# Altium PCB RevA.PcbDoc (part 1 of 2)
Units mm, origin at the board's own origin, x right, y up, seen from the top; angles counter-clockwise.
Board outline 119.55 x 74.88 mm, 2 copper layers (Top Layer, Bottom Layer); 154 components, 82 nets, 576 pads, 146 vias.
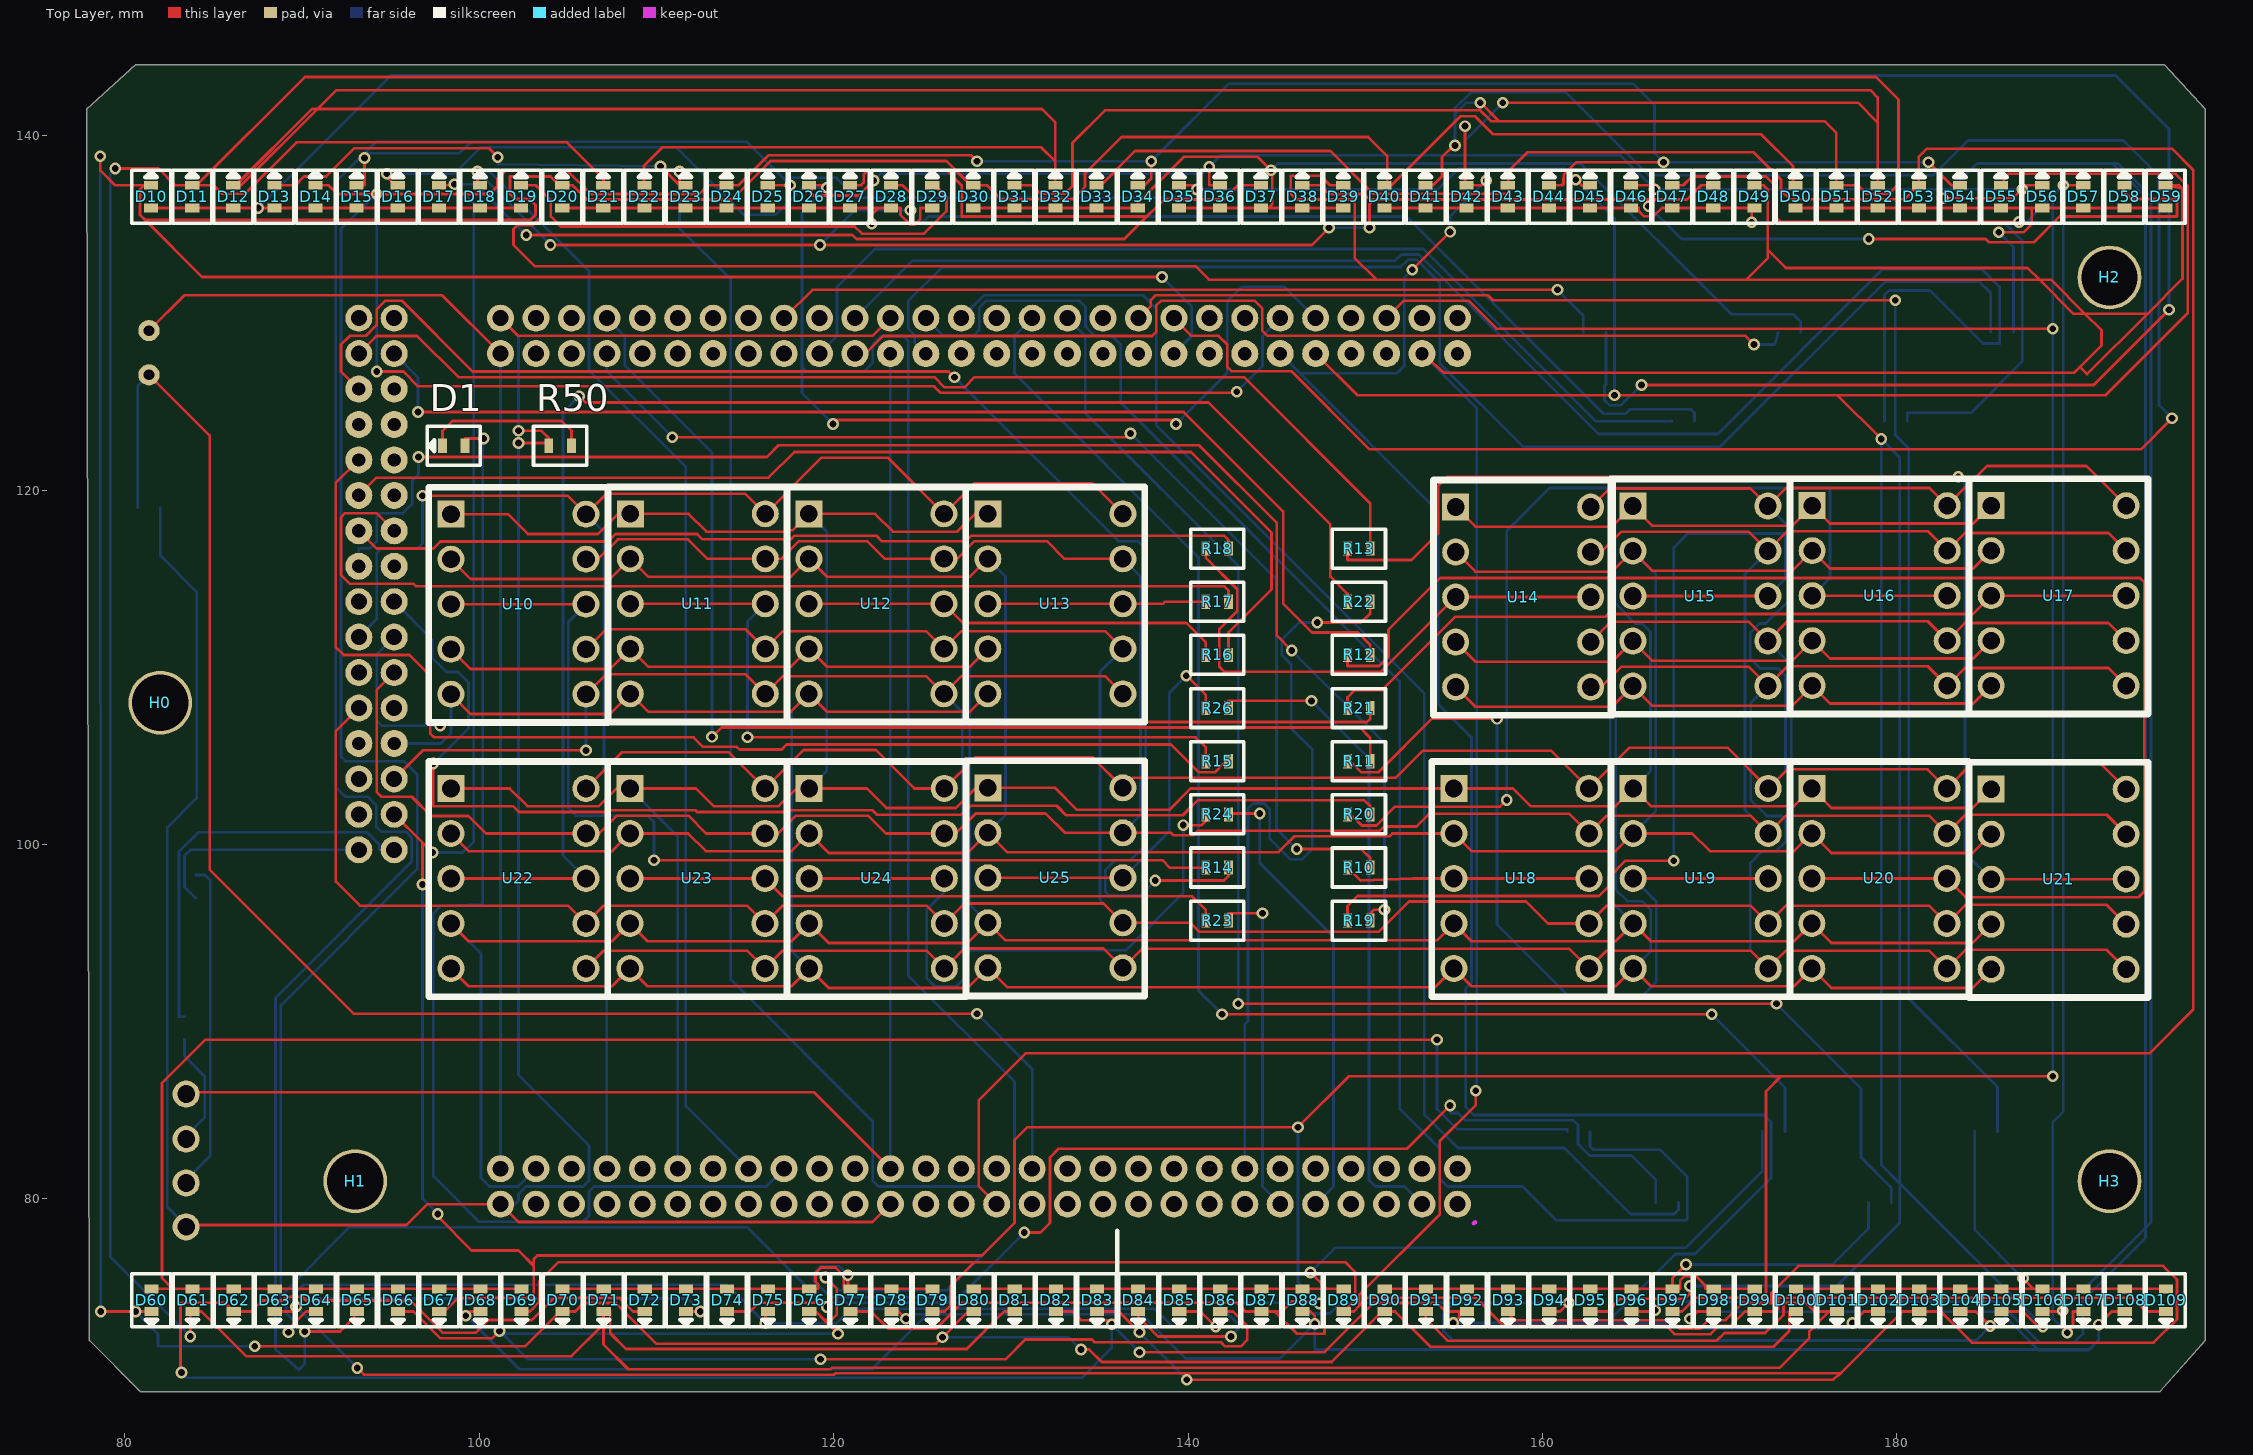
[diagram p0: Top Layer view]
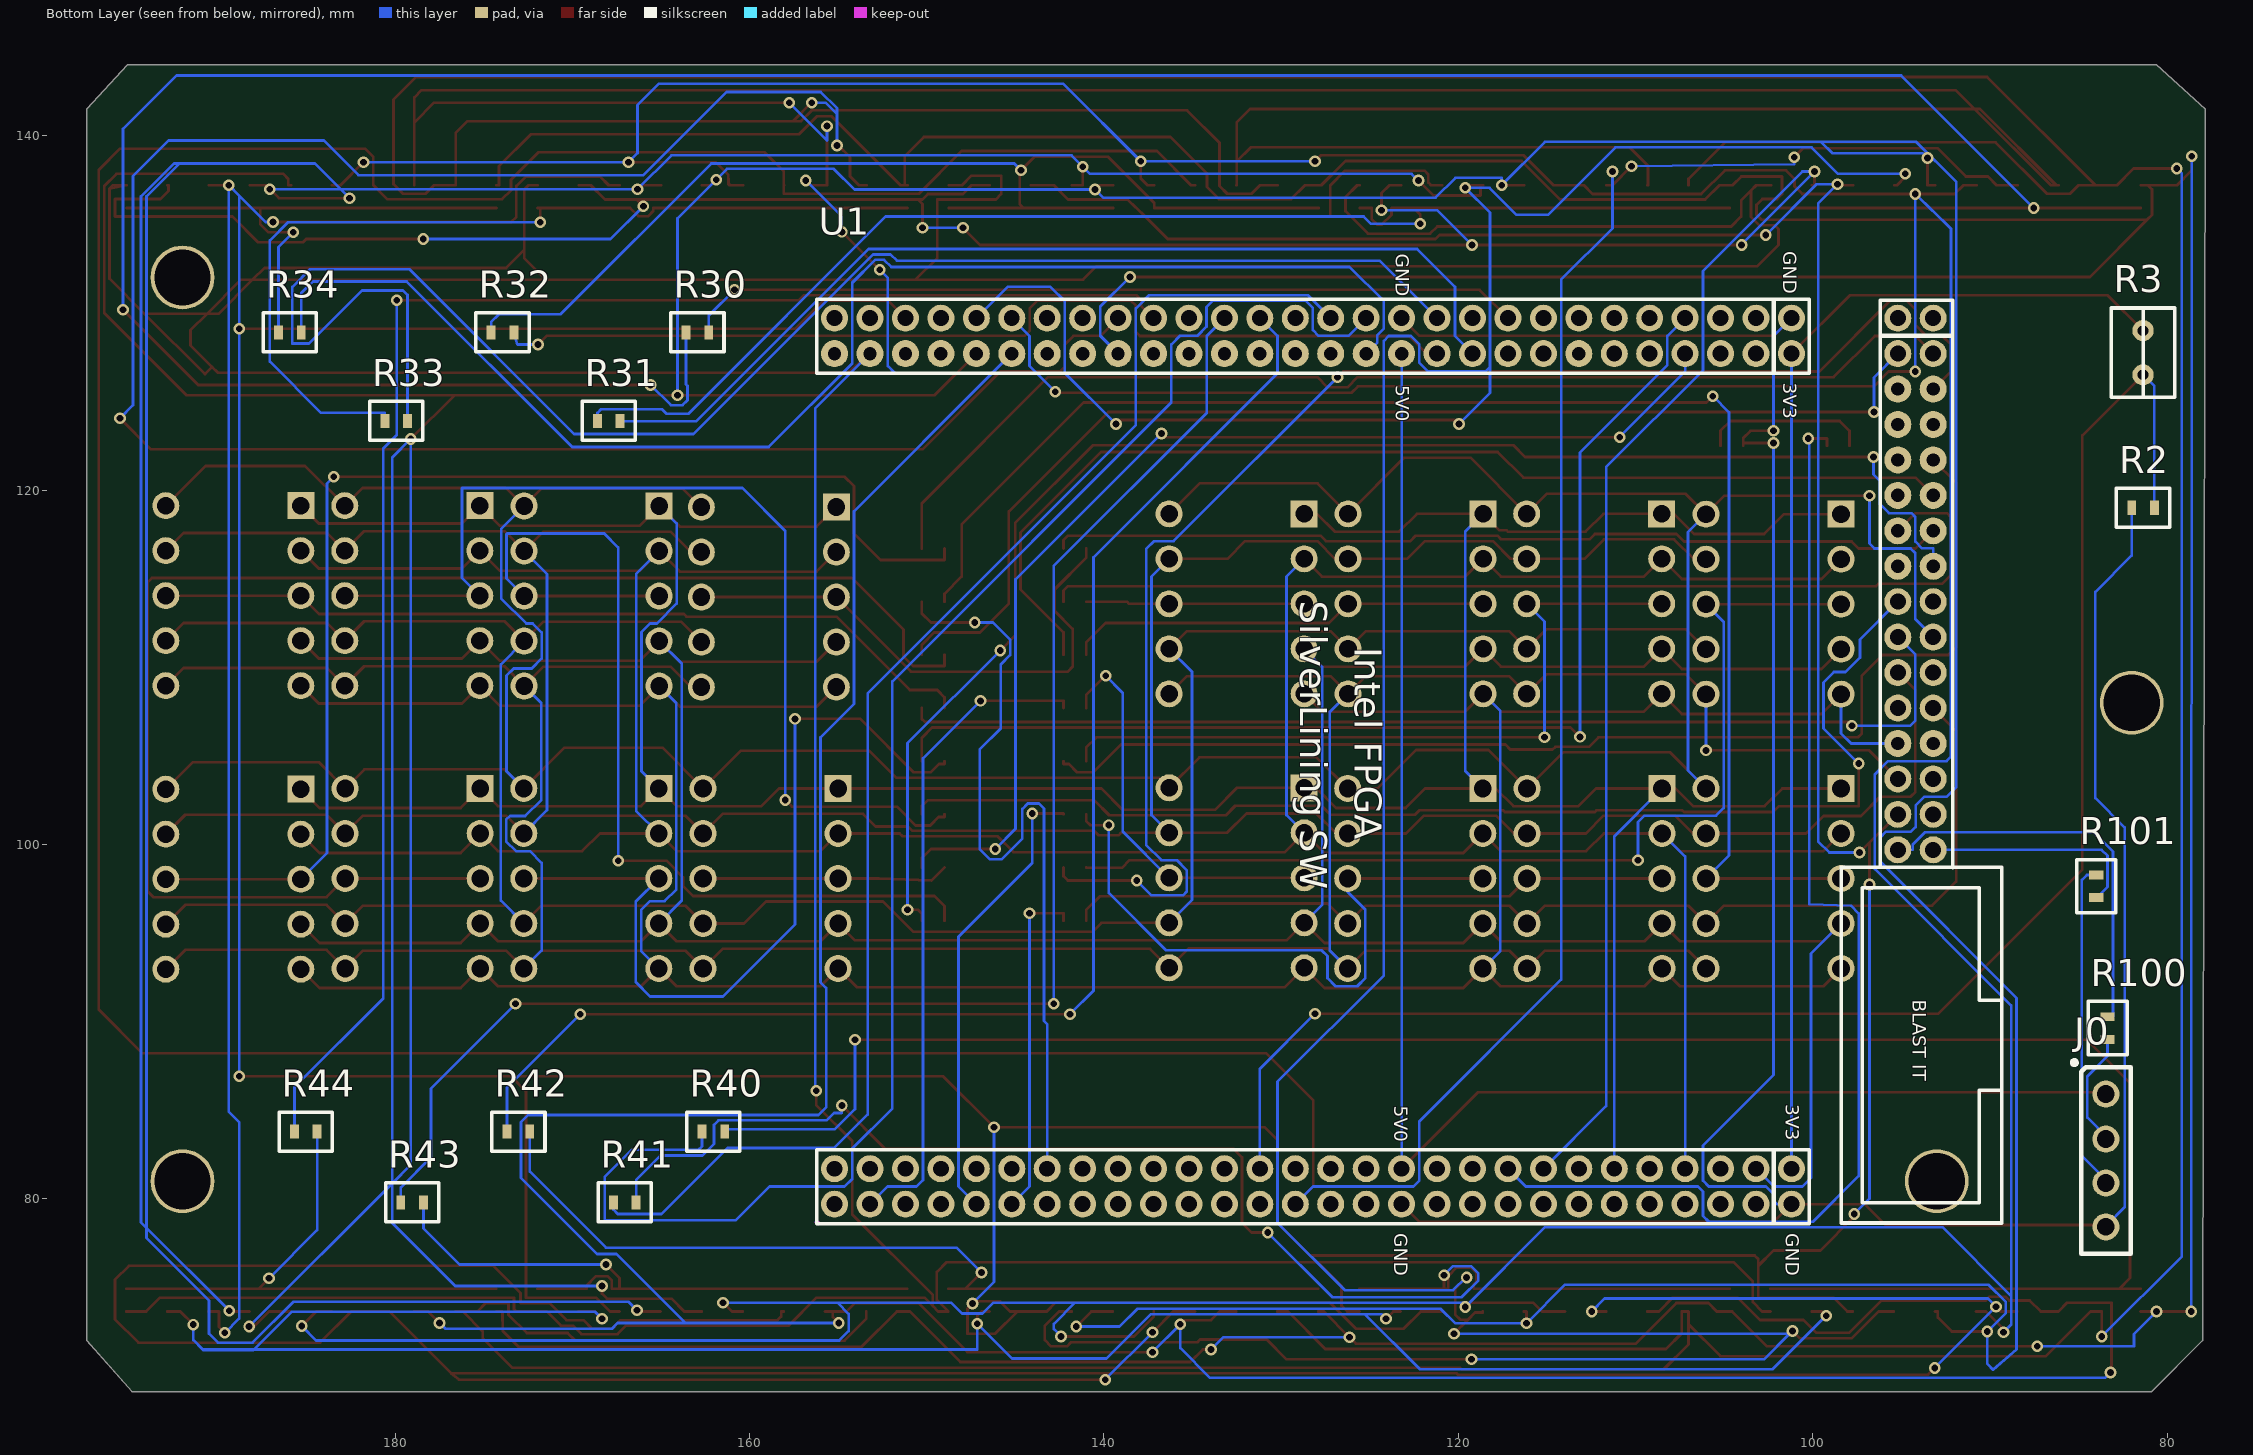
[diagram p1: Bottom Layer view, seen from below]

## Layer stack, top to bottom
Top Solder: solder mask 0.0102, Solder Resist, Dk 3.5
Top Layer: signal copper 0.0356
Dielectric1: dielectric 0.32, FR-4, Dk 4.8
Bottom Layer: signal copper 0.0356
Bottom Solder: solder mask 0.0102, Solder Resist, Dk 3.5

## Board outline
80.88,69.12 78,72 77.85,141.5 80.6,144 195.1,144 197.4,141.5 197.4,72 194.852,69.12

## Design rules (kind name [scope] priority, off if disabled: settings)
BoardOutlineClearance [All] p1: gap=0.254 ignorepadtopadclearanceinfootprint=FALSE
Clearance [All] p1: gap=0.254 ignorepadtopadclearanceinfootprint=FALSE except(0.152: Arc-Arc Arc-Track Arc-SMDPad Arc-THPad Arc-Via Arc-Fill Arc-Poly Arc-Region Arc-Text Track-Track Track-SMDPad Track-THPad Track-Via Track-Fill Track-Poly Track-Region Track-Text SMDPad-SMDPad SMDPad-THPad)
HoleSize [All] p1: absolutevalues=TRUE maxlimit=10 minlimit=0.381 maxpercent=80.000 minpercent=20.000
HoleToHoleClearance [All] p1: gap=0.481 allowstackedmicrovias=TRUE
MinimumAnnularRing [Not IsVia] p1: minimumring=0.18
MinimumSolderMaskSliver [All] p1: minsoldermaskwidth=0.064
PolygonConnect [All] p1: connectstyle=Relief reliefconductorwidth=0.254 reliefentries=4 polygonreliefangle="90 Angle" airgapwidth=0.254
RoomDefinition AFR_Bar_Termination_Resistors [InComponentClass('AFR_Bar_Termination_Resistors')] p1: confinementstyle=ConfineIn formatcopy=TRUE lockcomponents=FALSE outline 191,77.8 158.4,77.8 158.4,86.9 191,86.9
RoomDefinition Boost_Bar_Termination_Resistors [InComponentClass('Boost_Bar_Termination_Resistors')] p2: confinementstyle=ConfineIn formatcopy=TRUE lockcomponents=FALSE outline 200.86,121.9 158.94,121.9 158.94,132.9 200.86,132.9
RoomDefinition LED_Readout_Termination_Resistors [InComponentClass('LED_Readout_Termination_Resistors')] p3: confinementstyle=ConfineIn formatcopy=TRUE lockcomponents=FALSE outline 138.92,91.06 151.98,91.06 151.98,125.06 138.92,125.06
RoomDefinition Uart_and_Daylight_Sensor [InComponentClass('Uart_and_Daylight_Sensor')] p4: confinementstyle=ConfineIn formatcopy=TRUE lockcomponents=FALSE outline 91.36,71.1 73.6,71.1 73.6,138 91.36,138
RoomDefinition Core [InComponentClass('Core')] p5: confinementstyle=ConfineIn formatcopy=TRUE lockcomponents=FALSE outline 159.2,134.7 159.2,75.7 88.2,75.7 88.2,134.7
RoomDefinition LED_Readout_and_Warning_Lights [InComponentClass('LED_Readout_and_Warning_Lights')] p6: confinementstyle=ConfineIn formatcopy=TRUE lockcomponents=FALSE outline 86,86 195.8,86 195.8,126.8 86,126.8
RoomDefinition Hole4 [InComponentClass('Hole4')] p7: confinementstyle=ConfineIn formatcopy=TRUE lockcomponents=FALSE outline 195,78 195,84 187,84 187,78
RoomDefinition Hole3 [InComponentClass('Hole3')] p8: confinementstyle=ConfineIn formatcopy=TRUE lockcomponents=FALSE outline 195,129 195,135 187,135 187,129
RoomDefinition Hole2 [InComponentClass('Hole2')] p9: confinementstyle=ConfineIn formatcopy=TRUE lockcomponents=FALSE outline 90,78 96,78 96,86 90,86
RoomDefinition Hole1 [InComponentClass('Hole1')] p10: confinementstyle=ConfineIn formatcopy=TRUE lockcomponents=FALSE outline 79,105 85,105 85,113 79,113
RoomDefinition Boost_Bar [InComponentClass('Boost_Bar')] p11: confinementstyle=ConfineIn formatcopy=TRUE lockcomponents=FALSE outline 77.76,134.56 197.48,134.56 197.48,140.56 77.76,140.56
RoomDefinition AFR_bar [InComponentClass('AFR_bar')] p12: confinementstyle=ConfineIn formatcopy=TRUE lockcomponents=FALSE outline 77.5,72.4 197.5,72.4 197.5,79.4 77.5,79.4
RoutingPriority ClockPriority [InNet('XIN') OR InNet('XOUT') OR InNet('XIN32') OR InNet('XOUT32')] p1: routingpriority=80
RoutingPriority PowerPriority [InNet('1V8') OR InNet('3V3') OR InNet('VBAT') OR InNet('5V') OR InNet('GND') OR InNet('VDDANA') OR InNet('VDDUTMI') OR InNet('VDDPLL')] p2: routingpriority=90
RoutingPriority DiffPairsPriority [InNet('CAN_N')   OR InNet('CAN_P') OR InNet('USBD_N') OR InNet('USBD_P') OR InNet('USBH_N') OR InNet('USBH_P')] p3: routingpriority=100
RoutingVias [All] p1: holewidth=0.381 width=0.66 viastyle="Through Hole" minholewidth=0.381 minwidth=0.66 maxholewidth=0.381 maxwidth=0.66
SMDNeckDown [All] p1: percent=200.000
SilkToBoardRegionClearance SilkToBoardRegionClearance_1 [All] p2:
SilkToSilkClearance [All] p1: silktosilkclearance=0.152
SilkToSolderMaskClearance [IsPad] p1: minsilkscreentomaskgap=0.152 clearancetoexposedcopper=TRUE
SolderMaskExpansion [All] p1: expansion=0.102
Width SilkWidth [OnLayer('Top Overlay') or OnLayer('Bottom Overlay')] p1: maxlimit=2.54 minlimit=0.08 preferedwidth=0.127
Width [All] p2: maxlimit=0.2 minlimit=0.152 preferedwidth=0.152
24 further rules are at their usual default settings.

## Classes and differential pairs
component class LED_Readout_Termination_Resistors: R10 R11 R12 R13 R14 R15 R16 R17 R18 R19 R20 R21 R22 R23 R24 R26
component class Boost_Bar_Termination_Resistors: R30 R31 R32 R33 R34
component class AFR_Bar_Termination_Resistors: R40 R41 R42 R43 R44
component class Uart_and_Daylight_Sensor: J0 R2 R3 R100 R101
component class LED_Readout_and_Warning_Lights: D1 R50 U10 U11 U12 U13 U14 U15 U16 U17 U18 U19 U20 U21 U22 U23 U24 U25
component class Hole4: H3
component class Hole3: H2
component class Hole2: H1
component class Hole1: H0
component class Core: U1
component class Boost_Bar: D10 D11 D12 D13 D14 D15 D16 D17 D18 D19 D20 D21 D22 D23 D24 D25 D26 D27 D28 D29 D30 D31 D32 D33 D34 D35 D36 D37 D38 D39 D40 D41 D42 D43 D44 D45 D46 D47 D48 D49 D50 D51 D52 D53 D54 D55 D56 D57 D58 D59
component class AFR_bar: D60 D61 D62 D63 D64 D65 D66 D67 D68 D69 D70 D71 D72 D73 D74 D75 D76 D77 D78 D79 D80 D81 D82 D83 D84 D85 D86 D87 D88 D89 D90 D91 D92 D93 D94 D95 D96 D97 D98 D99 D100 D101 D102 D103 D104 D105 D106 D107 D108 D109

## Components (designator, comment, footprint, x,y, rotation, side; value= is the part's Value field where it differs from the comment)
D1 "WARNING" DIODE_0603 98.56,122.5 r180 top
D10 "" DIODE_0603 81.48,136.56 r90 top
D11 "" DIODE_0603 83.8,136.56 r90 top
D12 "" DIODE_0603 86.12,136.56 r90 top
D13 "" DIODE_0603 88.44,136.56 r90 top
D14 "" DIODE_0603 90.76,136.56 r90 top
D15 "" DIODE_0603 93.08,136.56 r90 top
D16 "" DIODE_0603 95.4,136.56 r90 top
D17 "" DIODE_0603 97.72,136.56 r90 top
D18 "" DIODE_0603 100.04,136.56 r90 top
D19 "" DIODE_0603 102.36,136.56 r90 top
D20 "" DIODE_0603 104.68,136.56 r90 top
D21 "" DIODE_0603 107,136.56 r90 top
D22 "" DIODE_0603 109.32,136.56 r90 top
D23 "" DIODE_0603 111.64,136.56 r90 top
D24 "" DIODE_0603 113.96,136.56 r90 top
D25 "" DIODE_0603 116.28,136.56 r90 top
D26 "" DIODE_0603 118.6,136.56 r90 top
D27 "" DIODE_0603 120.92,136.56 r90 top
D28 "" DIODE_0603 123.24,136.56 r90 top
D29 "" DIODE_0603 125.56,136.56 r90 top
D30 "" DIODE_0603 127.88,136.56 r90 top
D31 "" DIODE_0603 130.2,136.56 r90 top
D32 "" DIODE_0603 132.52,136.56 r90 top
D33 "" DIODE_0603 134.84,136.56 r90 top
D34 "" DIODE_0603 137.16,136.56 r90 top
D35 "" DIODE_0603 139.48,136.56 r90 top
D36 "" DIODE_0603 141.8,136.56 r90 top
D37 "" DIODE_0603 144.12,136.56 r90 top
D38 "" DIODE_0603 146.44,136.56 r90 top
D39 "" DIODE_0603 148.76,136.56 r90 top
D40 "" DIODE_0603 151.08,136.56 r90 top
D41 "" DIODE_0603 153.4,136.56 r90 top
D42 "" DIODE_0603 155.72,136.56 r90 top
D43 "" DIODE_0603 158.04,136.56 r90 top
D44 "" DIODE_0603 160.36,136.56 r90 top
D45 "" DIODE_0603 162.68,136.56 r90 top
D46 "" DIODE_0603 165,136.56 r90 top
D47 "" DIODE_0603 167.32,136.56 r90 top
D48 "" DIODE_0603 169.64,136.56 r90 top
D49 "" DIODE_0603 171.96,136.56 r90 top
D50 "" DIODE_0603 174.28,136.56 r90 top
D51 "" DIODE_0603 176.6,136.56 r90 top
D52 "" DIODE_0603 178.92,136.56 r90 top
D53 "" DIODE_0603 181.24,136.56 r90 top
D54 "" DIODE_0603 183.56,136.56 r90 top
D55 "" DIODE_0603 185.88,136.56 r90 top
D56 "" DIODE_0603 188.2,136.56 r90 top
D57 "" DIODE_0603 190.52,136.56 r90 top
D58 "" DIODE_0603 192.84,136.56 r90 top
D59 "" DIODE_0603 195.16,136.56 r90 top
D60 "" DIODE_0603 81.5,74.28 r270 top
D61 "" DIODE_0603 83.82,74.28 r270 top
D62 "" DIODE_0603 86.14,74.28 r270 top
D63 "" DIODE_0603 88.46,74.28 r270 top
D64 "" DIODE_0603 90.78,74.28 r270 top
D65 "" DIODE_0603 93.1,74.28 r270 top
D66 "" DIODE_0603 95.42,74.28 r270 top
D67 "" DIODE_0603 97.74,74.28 r270 top
D68 "" DIODE_0603 100.06,74.28 r270 top
D69 "" DIODE_0603 102.38,74.28 r270 top
D70 "" DIODE_0603 104.7,74.28 r270 top
D71 "" DIODE_0603 107.02,74.28 r270 top
D72 "" DIODE_0603 109.34,74.28 r270 top
D73 "" DIODE_0603 111.66,74.28 r270 top
D74 "" DIODE_0603 113.98,74.28 r270 top
D75 "" DIODE_0603 116.3,74.28 r270 top
D76 "" DIODE_0603 118.62,74.28 r270 top
D77 "" DIODE_0603 120.94,74.28 r270 top
D78 "" DIODE_0603 123.26,74.28 r270 top
D79 "" DIODE_0603 125.58,74.28 r270 top
D80 "" DIODE_0603 127.9,74.28 r270 top
D81 "" DIODE_0603 130.22,74.28 r270 top
D82 "" DIODE_0603 132.54,74.28 r270 top
D83 "" DIODE_0603 134.86,74.28 r270 top
D84 "" DIODE_0603 137.18,74.28 r270 top
D85 "" DIODE_0603 139.5,74.28 r270 top
D86 "" DIODE_0603 141.82,74.28 r270 top
D87 "" DIODE_0603 144.14,74.28 r270 top
D88 "" DIODE_0603 146.46,74.28 r270 top
D89 "" DIODE_0603 148.78,74.28 r270 top
D90 "" DIODE_0603 151.1,74.28 r270 top
D91 "" DIODE_0603 153.42,74.28 r270 top
D92 "" DIODE_0603 155.74,74.28 r270 top
D93 "" DIODE_0603 158.06,74.28 r270 top
D94 "" DIODE_0603 160.38,74.28 r270 top
D95 "" DIODE_0603 162.7,74.28 r270 top
D96 "" DIODE_0603 165.02,74.28 r270 top
D97 "" DIODE_0603 167.34,74.28 r270 top
D98 "" DIODE_0603 169.66,74.28 r270 top
D99 "" DIODE_0603 171.98,74.28 r270 top
D100 "" DIODE_0603 174.3,74.28 r270 top
D101 "" DIODE_0603 176.62,74.28 r270 top
D102 "" DIODE_0603 178.94,74.28 r270 top
D103 "" DIODE_0603 181.26,74.28 r270 top
D104 "" DIODE_0603 183.58,74.28 r270 top
D105 "" DIODE_0603 185.9,74.28 r270 top
D106 "" DIODE_0603 188.22,74.28 r270 top
D107 "" DIODE_0603 190.54,74.28 r270 top
D108 "" DIODE_0603 192.86,74.28 r270 top
D109 "" DIODE_0603 195.18,74.28 r270 top
H0 "STANDOFF HOLE" HOLE_3MM 82,108 r0 top
H1 "STANDOFF HOLE" HOLE_3MM 93,81 r0 top
H2 "STANDOFF HOLE" HOLE_3MM 192,132 r90 top
H3 "STANDOFF HOLE" HOLE_3MM 192,81 r90 top
J0 "CONN HEADER R/A SGL 4POS GOLD (display)" HEADER_4POS -1176.257,1342.959 r180 bottom
R2 "Figure out ohmage after RevA" RES_0603 81.36,119 r180 bottom value=NOSTUFF
R3 "Daylight photocell to connect in series forming voltage divider" RES_NSL-19M51 81.36,129 r270 bottom
R10 "Figure out ohmage after RevA" RES_0603 149.64,98.7 r180 top value=NOSTUFF
R11 "Figure out ohmage after RevA" RES_0603 149.64,104.7 r180 top value=NOSTUFF
R12 "Figure out ohmage after RevA" RES_0603 149.64,110.7 r180 top value=NOSTUFF
R13 "Figure out ohmage after RevA" RES_0603 149.64,116.7 r180 top value=NOSTUFF
R14 "Figure out ohmage after RevA" RES_0603 141.64,98.7 r180 top value=NOSTUFF
R15 "Figure out ohmage after RevA" RES_0603 141.64,104.7 r180 top value=NOSTUFF
R16 "Figure out ohmage after RevA" RES_0603 141.64,110.7 r180 top value=NOSTUFF
R17 "Figure out ohmage after RevA" RES_0603 141.64,113.7 r180 top value=NOSTUFF
R18 "Figure out ohmage after RevA" RES_0603 141.64,116.7 r180 top value=NOSTUFF
R19 "Figure out ohmage after RevA" RES_0603 149.64,95.7 r180 top value=NOSTUFF
R20 "Figure out ohmage after RevA" RES_0603 149.64,101.7 r180 top value=NOSTUFF
R21 "Figure out ohmage after RevA" RES_0603 149.64,107.7 r180 top value=NOSTUFF
R22 "Figure out ohmage after RevA" RES_0603 149.64,113.7 r180 top value=NOSTUFF
R23 "Figure out ohmage after RevA" RES_0603 141.64,95.7 r180 top value=NOSTUFF
R24 "Figure out ohmage after RevA" RES_0603 141.64,101.7 r180 top value=NOSTUFF
R26 "Figure out ohmage after RevA" RES_0603 141.64,107.7 r180 top value=NOSTUFF
R30 "Figure out ohmage after RevA" RES_0603 162.94,128.9 r0 bottom value=NOSTUFF
R31 "Figure out ohmage after RevA" RES_0603 167.94,123.9 r0 bottom value=NOSTUFF
R32 "Figure out ohmage after RevA" RES_0603 173.94,128.9 r0 bottom value=NOSTUFF
R33 "Figure out ohmage after RevA" RES_0603 179.94,123.9 r0 bottom value=NOSTUFF
R34 "Figure out ohmage after RevA" RES_0603 185.94,128.9 r0 bottom value=NOSTUFF
R40 "Figure out ohmage after RevA" RES_0603 162.04,83.8 r180 bottom value=NOSTUFF
R41 "Figure out ohmage after RevA" RES_0603 167.04,79.8 r180 bottom value=NOSTUFF
R42 "Figure out ohmage after RevA" RES_0603 173.04,83.8 r180 bottom value=NOSTUFF
R43 "Figure out ohmage after RevA" RES_0603 179.04,79.8 r180 bottom value=NOSTUFF
R44 "Figure out ohmage after RevA" RES_0603 185.04,83.8 r180 bottom value=NOSTUFF
R50 "Figure out ohmage after RevA" RES_0603 104.56,122.5 r180 top value=NOSTUFF
R100 "0R" RES_0603 83.36,89.64 r90 bottom value=NOSTUFF
R101 "Figure out ohmage after RevA" RES_0603 84,97.64 r90 bottom value=NOSTUFF
U1 "CoreEP3C16" COREEP3C16 125.077,104.166 r270 bottom
U10 "TDSR1050" TDSR1050 98.4,118.64 r0 top
U11 "TDSR1050" TDSR1050 108.52,118.66 r0 top
U12 "TDSR1050" TDSR1050 118.6,118.66 r0 top
U13 "TDSR1050" TDSR1050 128.7,118.66 r0 top
U14 "TDSR1050" TDSR1050 155.1,119.04 r0 top
U15 "TDSR1050" TDSR1050 165.1,119.1 r0 top
U16 "TDSR1050" TDSR1050 175.22,119.12 r0 top
U17 "TDSR1050" TDSR1050 185.32,119.12 r0 top
U18 "TDSR1050" TDSR1050 155,103.16 r0 top
U19 "TDSR1050" TDSR1050 165.12,103.16 r0 top
U20 "TDSR1050" TDSR1050 175.2,103.16 r0 top
U21 "TDSR1050" TDSR1050 185.32,103.12 r0 top
U22 "TDSR1050" TDSR1050 98.4,103.16 r0 top
U23 "TDSR1050" TDSR1050 108.5,103.16 r0 top
U24 "TDSR1050" TDSR1050 118.62,103.16 r0 top
U25 "TDSR1050" TDSR1050 128.7,103.2 r0 top

## Footprints (in the part's own frame and the unit in brackets; to place one, negate y for a bottom-side part, rotate by r counter-clockwise, add the part's x,y. Pads: shape width x height; smd on the part's side, far side on the other; paste and mask are expansions set on the pad)
COREEP3C16 [mil] "ALTERA Cyclone III FPGA Development Board Full I/O Expander JTAG Interface"
  round 60 hole 35.43: 3V31(-926.55,940.04) 3V32(884.47,940.04) 4(-926.55,625.08) 5(-1005.29,625.08) 5V02(884.47,73.9) 6(-926.55,546.34) 9(-1005.29,546.34) 18(-1005.29,467.6) 19(-926.55,388.86) 20(-1005.29,388.86) 21(-926.55,310.12) 22(-1005.29,310.12) 37(-926.55,231.38) 38(-1005.29,231.38) 39(-926.55,152.64) 41(-1005.29,152.64) 44(-1005.29,-4.84) 46(-1005.29,-83.58) 50(-1005.29,-162.32) 52(-1005.29,-241.07) 56(-1005.29,-319.81) 63(-1005.29,-398.55) 65(-1005.29,-477.29) 69(-1005.29,-556.03) 71(-1005.29,-634.77) 73(-1005.29,-713.51) 78(-1005.29,-792.25) 82(-1005.29,-870.99) 84(-1005.29,-949.73) 86(-1005.29,-1028.47) 86(97.07,1176.26) 93(-1005.29,-1107.21) 95(-1005.29,-1185.95) 100(884.47,-1185.95) 101(963.21,-1185.95) 102(884.47,-1107.21) 103(963.21,-1107.21) 104(884.47,-1028.47) 107(963.21,-1028.47) 108(884.47,-949.73) 110(963.21,-949.73) 111(884.47,-870.99) 112(963.21,-870.99) 113(884.47,-792.25) 114(963.21,-792.25) 117(884.47,-713.51) 118(963.21,-713.51) 119(884.47,-634.77) 120(963.21,-634.77) 126(884.47,-556.03) 127(963.21,-556.03) 128(884.47,-477.29) 131(963.21,-477.29) 132(884.47,-398.55) 133(963.21,-398.55) 134(884.47,-319.81) 135(963.21,-319.81) 137(884.47,-241.07) 139(963.21,-241.07) 142(884.47,-162.32) 143(963.21,-162.32) 144(884.47,-83.58) 145(963.21,-83.58) 146(884.47,-4.84) 147(963.21,-4.84) 148(884.47,152.64) 159(963.21,152.64) 160(884.47,231.38) 161(963.21,231.38) 162(884.47,310.12) 164(963.21,310.12) 166(884.47,388.86) 167(963.21,388.86) 168(884.47,467.6) 169(963.21,467.6) 171(884.47,546.34) 173(963.21,546.34) 174(884.47,625.08) 175(963.21,625.08) 176(884.47,703.82) 177(963.21,703.82) 181(884.47,782.56) 182(963.21,782.56) 183(884.47,861.3) 184(963.21,861.3) 185(175.81,1255) 186(175.81,1176.26) 187(97.07,1255) 189(18.33,1255) 194(18.33,1176.26) 197(-139.15,1255) 198(-139.15,1176.26) 199(-217.89,1255) 200(-217.89,1176.26) 201(-296.63,1255) 202(-296.63,1176.26) 203(-375.37,1255) 207(-375.37,1176.26) 231(-926.55,1255) 232(-926.55,1176.26) 233(-1005.29,1255) 234(-1005.29,1176.26) 235(-1005.29,861.3) 236(-926.55,861.3) 237(-1005.29,782.56) 238(-926.55,782.56) 239(-1005.29,703.82) 240(-926.55,703.82) GND1(-1005.29,940.04) GND2(-1005.29,73.9) GND3(963.21,73.9) GND4(963.21,940.04)
  round 60 hole 29.53: 5V01(-926.55,73.9) 13(-926.55,467.6) 43(-926.55,-4.84) 45(-926.55,-83.58) 49(-926.55,-162.32) 51(-926.55,-241.07) 55(-926.55,-319.81) 57(-926.55,-398.55) 64(-926.55,-477.29) 68(-926.55,-556.03) 70(-926.55,-634.77) 72(-926.55,-713.51) 76(-926.55,-792.25) 81(-926.55,-870.99) 83(-926.55,-949.73) 85(-926.55,-1028.47) 87(-926.55,-1107.21) 94(-926.55,-1185.95) 195(-60.41,1255) 196(-60.41,1176.26) 214(-454.11,1255) 216(-454.11,1176.26) 217(-532.85,1255) 218(-532.85,1176.26) 219(-611.59,1255) 220(-611.59,1176.26) 221(-690.33,1255) 222(-690.33,1176.26) 223(-769.07,1255) 224(-769.07,1176.26) 226(-847.81,1255) 230(-847.81,1176.26)
  Keep-Out Layer lines w10: 1006.06,-1222.56 1003.06,-1225.56
  silkscreen extent -1047,-1225 1007,1407, body extent -1047,-1222 1000,1376, height 394
DIODE_0603 [mm]
  rect 0.5x0.8 smd: 1(-0.64,0) 2(0.64,0)
  silkscreen extent -1.5,-1.1 1.5,1.1, body extent -0.83,-0.45 0.83,0.44, height 0.35
HEADER_4POS [mil] "4 Positions Header, Unshrouded Connector 0.100\" (2.54mm) Through Hole, Right Angle Gold"
  round 60 hole 39.37: 1(-49595,-49490) 2(-49595,-49590) 3(-49595,-49687.5) 4(-49595,-49785)
  silkscreen extent -49670,-49845 -49540,-49415, body extent -49643,-49847 -49228,-49432, height 193
HOLE_3MM [mm] "A 3mm wide drill hole."
  round 3.6 hole 3.175: 0(0,0)
RES_0603 [mm]
  rect 0.5x0.8 smd: 1(-0.64,0) 2(0.64,0)
  silkscreen extent -1.5,-1.1 1.5,1.1, body extent -0.82,-0.44 0.83,0.45, height 0.35
RES_NSL-19M51 [mm]
  round 1.2 hole 0.6: 1(0,0) 2(2.5,0)
  silkscreen extent -1.28,-1.8 3.78,1.8
TDSR1050 [mil] "High Intensity Red Low Current 7-Segment Display"
  rect 60x60 hole 39.37: 1(0,0)
  round 60 hole 39.37: 2(0,-100) 3(0,-200) 4(0,-300) 5(0,-400) 6(300,-400) 7(300,-300) 8(300,-200) 9(300,-100) 10(300,0)
  silkscreen extent -49,-463 348,60, body extent -35,-451 337,45, height 276

## Part data
D1 D10 D11 D12 D13 D14 D15 D16 D17 D18 D19 D20 D21 D22 D23 D24 D25 D26 D27 D28 D29 D30 D31 D32 D33 D34 D35 D36 D37 D38 D39 D40 D41 D42 D43 D44 D45 D46 D47 D48 D49 D50 D51 D52 D53 D54 D55 D56 D57 D58 D59 D60 D61 D62 D63 D64 D65 D66 D67 D68 D69 D70 D71 D72 D73 D74 D75 D76 D77 D78 D79 D80 D81 D82 D83 D84 D85 D86 D87 D88 D89 D90 D91 D92 D93 D94 D95 D96 D97 D98 D99 D100 D101 D102 D103 D104 D105 D106 D107 D108 D109: library part LED0, "Typical INFRARED GaAs LED", LatestRevisionDate=08-Jul-2005, LatestRevisionNote="Mech Layer 1 removed.", PackageDescription="LED; 2 Leads", PackageReference=LED-0, Published=8-Jun-2000, Publisher="Altium Limited"
H0 H1 H2 H3: library part "3mm HOLE"
J0: "http://multimedia.3m.com/mws/media/548122O/3mtm-pin-strip-header-ts2182.pdf", Supplier Part Number 1=3M9469-ND, Supplier 1=Digi-Key
R2 R10 R11 R12 R13 R14 R15 R16 R17 R18 R19 R20 R21 R22 R23 R24 R26 R30 R31 R32 R33 R34 R40 R41 R42 R43 R44 R50 R100 R101: library part Res1, "Resistor", LatestRevisionDate=17-Jul-2002, LatestRevisionNote="Re-released for DXP Platform.", PackageDescription="Axial Device, Thru-Hole; 2 Leads; 0.3 in Pin Spacing", PackageReference=AXIAL-0.3, Published=8-Jun-2000, Publisher="Altium Limited"
R3: library part "PHOTOCELL 16-33KOHM", "http://media.digikey.com/pdf/Data%20Sheets/Photonic%20Detetectors%20Inc%20PDFs/PDV-P8103.pdf", Supplier Part Number 1=PDV-P8103-ND, Supplier 1=Digi-Key
U1: "Intel FPGA Core"
U10 U11 U12 U13 U14 U15 U16 U17 U18 U19 U20 U21 U22 U23 U24 U25: "High Intensity Red Low Current 7-Segment Display", Supplier Part Number 1=TDSR1050-ND, Supplier 1=Digi-Key

## Via types
v1: diameter 0.66, hole 0.381, Top Layer to Bottom Layer, 146 vias

## Nets (pads, with @x,y where several pads share a name; then routed paths per layer and width w, separated by ;. In a path a pad name is that pad's centre, name@x,y a point inside that pad or via, vN(x,y) a via of type N, cw(c..) or ccw(c..) an arc to the next point about the centre after c; other vN are vias at no path point)
3V3: R3.1 U1.3V31 U1.3V32 | length 68
  Top Layer w0.152: R3.1@81.36,129 83.355,130.995 97.905,130.995 U1.3V31@101.2,127.7
  Bottom Layer w0.152: U1.3V32@101.2,81.7 U1.3V31@101.2,127.7
5V0: J0.1 U1.5V01 U1.5V02 | length 87.6
  Top Layer w0.152: J0.1@83.4,86.016 118.884,86.016 U1.5V02@123.2,81.7
  Bottom Layer w0.152: U1.5V02@123.2,81.7 U1.5V01@123.2,127.7
C0: R10.2 U18.3 U18.8 | length 13.9
  Top Layer w0.152: R10.2@149,98.7 149.732,97.968 152.69,98.08 U18.3@155,98.08 U18.8@162.62,98.08
C0/IO_VB8N3_240: R10.1 U1.240 | length 64.4
  Top Layer w0.152: v1(110.896,122.987) 136.55,122.987 v1(136.754,123.19) ; v1(146.126,99.746) 149.758,99.746 150.28,99.224 R10.1@150.28,98.7
  Bottom Layer w0.152: U1.240@107.2,127.7 107.2,126.683 v1(110.896,122.987) ; v1(136.754,123.19) 144.984,114.959 144.984,100.888 v1(146.126,99.746)
C1: R11.2 U19.3 U19.8 | length 46.7
  Top Layer w0.152: R11.2@149,104.7 149,104.546 149.309,104.546 149.784,104.072 150.732,104.072 153.746,107.086 v1(157.429,107.086) ; U19.3@165.12,98.08 U19.8@172.74,98.08
  Bottom Layer w0.152: v1(157.429,107.086) 157.429,95.479 161.493,91.415 165.608,91.415 166.421,92.227 166.421,96.779 U19.3@165.12,98.08
C1/IO_VB8N3_239: R11.1 U1.239 | length 65
  Top Layer w0.152: v1(113.132,106.07) 113.664,106.603 149.696,106.603 150.28,106.02 R11.1@150.28,104.7
  Bottom Layer w0.152: U1.239@107.2,129.7 108.204,128.696 108.204,127.051 113.132,122.123 v1(113.132,106.07)
C2: R12.2 U20.3 U20.8 | length 85.4
  Top Layer w0.152: R12.2@149,110.7 149,110.072 150.774,110.072 151.312,110.61 151.312,112.12 154.229,115.037 193.726,115.037 193.954,114.808 193.954,97.333 193.65,97.028 183.872,97.028 U20.8@182.82,98.08 U20.3@175.2,98.08
C2/IO_VB8N2_232: R12.1 U1.232 | length 66.6
  Top Layer w0.152: v1(96.545,124.409) 139.751,124.409 145.364,118.796 145.364,113.589 146.994,111.959 149.584,111.959 150.28,111.264 R12.1@150.28,110.7
  Bottom Layer w0.152: U1.232@95.2,127.7 96.545,126.355 v1(96.545,124.409)
C3: R13.2 U21.3 U21.8 | length 69.7
  Top Layer w0.152: R13.2@149,116.7 149,116.053 152.603,116.053 154.102,117.551 154.102,120.218 154.635,120.752 v1(183.464,120.752) ; U21.3@185.32,98.04 U21.8@192.94,98.04
  Bottom Layer w0.152: v1(183.464,120.752) 183.845,120.371 183.845,99.515 U21.3@185.32,98.04
C3/IO_VB8N2_231: R13.1 U1.231 | length 64.4
  Top Layer w0.152: U1.231@93.2,127.7 94.19,128.69 96.495,128.69 98.815,126.37 125.69,126.37 126.264,125.796 127.381,125.796 127.955,126.37 143.15,126.37 150.28,119.239 R13.1@150.28,116.7
C4: R14.2 U10.3 U10.8 | length 58.2
  Top Layer w0.152: U10.3@98.4,113.56 U10.8@106.02,113.56 ; v1(109.855,99.111) 138.557,99.111 138.989,98.679 141,98.679 R14.2@141,98.7
  Bottom Layer w0.152: U10.8@106.02,113.56 105.029,112.569 105.029,102.057 105.461,101.625 109.499,101.625 109.855,101.27 v1(109.855,99.111)
C4/IO_VB8N2_226: R14.1 U1.226 | length 84.5
  Top Layer w0.152: U1.226@93.2,125.7 92.202,126.698 92.202,128.219 92.693,128.71 93.61,128.71 94.209,129.308 94.209,130.2 94.698,130.69 95.624,130.69 99.619,126.695 126.492,126.695 v1(126.822,126.365) ; v1(138.151,97.968) 142.037,97.968 142.28,98.211 R14.1@142.28,98.7
  Bottom Layer w0.152: v1(126.822,126.365) 136.068,117.119 137.16,117.119 137.617,116.662 137.617,99.974 136.754,99.111 135.889,99.111 135.33,98.552 135.33,97.333 135.533,97.13 137.312,97.13 v1(138.151,97.968)
C5: R15.2 U11.3 U11.8 | length 42.4
  Top Layer w0.152: U11.3@108.52,113.58 U11.8@116.14,113.58 ; v1(115.138,106.045) 140.416,106.045 141,105.461 R15.2@141,104.7
  Bottom Layer w0.152: v1(115.138,106.045) 115.138,112.578 U11.8@116.14,113.58
C5/IO_VB8N2_221: R15.1 U1.221 | length 66.9
  Top Layer w0.152: U1.221@93.2,121.7 91.897,120.397 91.897,111.15 92.354,110.693 96.063,110.693 97.231,109.525 97.231,106.274 97.46,106.045 112.09,106.045 112.623,105.512 114.528,105.512 114.681,105.359 117.069,105.359 117.348,105.639 139.04,105.639 140.606,104.072 141.503,104.072 141.978,104.546 142.28,104.546 R15.1@142.28,104.7
C6: R16.2 U12.3 U12.8 | length 24
  Top Layer w0.152: U12.3@118.6,113.58 U12.8@126.22,113.58 127.303,112.497 139.908,112.497 141,111.404 R16.2@141,110.7
C6/IO_VB8N1_219: R16.1 U1.219 | length 62.3
  Top Layer w0.152: U1.219@93.2,119.7 94.201,120.701 116.332,120.701 117.78,122.149 140.157,122.149 144.704,117.602 144.704,114.396 142.28,111.973 R16.1@142.28,110.7
C7: R17.2 U13.3 U13.8 | length 12.3
  Top Layer w0.152: U13.3@128.7,113.58 U13.8@136.32,113.58 138.582,113.58 138.702,113.7 R17.2@141,113.7
C7/IO_VB8N0_218: R17.1 U1.218 | length 57.8
  Top Layer w0.152: U1.218@95.2,117.7 94.206,118.694 92.431,118.694 92.202,118.466 92.202,115.214 92.71,114.706 96.291,114.706 96.418,114.579 142.037,114.579 142.28,114.336 R17.1@142.28,113.7
C8: R18.2 U14.3 U14.8 | length 30.6
  Top Layer w0.152: R18.2@141,116.7 141,116.175 142.773,114.402 142.773,113.182 141.762,112.171 141.762,110.028 142.037,109.753 150.893,109.753 U14.3@155.1,113.96 U14.8@162.72,113.96
C8/IO_VB8N0_217: R18.1 U1.217 | length 50.9
  Top Layer w0.152: U1.217@93.2,117.7 94.2,116.7 97.409,116.7 97.803,117.094 107.256,117.094 107.688,117.526 112.293,117.526 112.598,117.221 117.577,117.221 117.78,117.424 122.403,117.424 122.707,117.119 127.462,117.119 127.766,117.424 142.037,117.424 142.28,117.181 R18.1@142.28,116.7
C9: R19.2 U15.3 U15.8 | length 56.4
  Top Layer w0.152: R19.2@149,95.7 149,96.52 149.57,97.09 163.181,97.09 163.754,97.663 163.754,98.146 164.694,99.085 v1(167.411,99.085) ; U15.3@165.1,114.02 U15.8@172.72,114.02
  Bottom Layer w0.152: v1(167.411,99.085) 167.411,116.764 168.199,117.551 173.685,117.551 173.71,117.526 173.71,115.01 U15.8@172.72,114.02
C9/IO_VB8N0_214: R19.1 U1.214 | length 84.8
  Top Layer w0.152: v1(96.571,121.869) 116.23,121.869 116.891,122.53 140.614,122.53 145.009,118.135 145.009,111.785 v1(145.847,110.947) ; R19.1@150.28,95.7 150.28,96.114 150.483,96.317 v1(151.079,96.317)
  Bottom Layer w0.152: U1.214@93.2,115.7 93.2,116.71 93.824,116.71 94.209,117.094 94.209,118.466 94.437,118.694 95.707,118.694 96.215,119.202 96.215,120.523 96.571,120.879 v1(96.571,121.869) ; v1(145.847,110.947) 151.079,105.715 v1(151.079,96.317)
C10: R20.2 U16.3 U16.8 | length 58.5
  Top Layer w0.152: R20.2@149,101.7 149,101.549 149.324,101.549 149.802,101.072 150.627,101.072 151.689,102.133 157.607,102.133 v1(157.988,102.514) ; U16.3@175.22,114.04 U16.8@182.84,114.04
  Bottom Layer w0.152: v1(157.988,102.514) 157.988,117.704 160.401,120.117 176.225,120.117 176.225,115.045 U16.3@175.22,114.04
C10/IO_VB7N3_207: R20.1 U1.207 | length 69.1
  Top Layer w0.152: v1(97.409,104.572) 97.409,102.159 101.905,102.159 102.235,101.829 107.264,101.829 107.366,101.93 112.192,101.93 112.293,101.829 117.373,101.829 117.475,101.93 122.199,101.93 122.453,101.676 127.203,101.676 127.711,102.184 132.587,102.184 133.121,101.65 139.699,101.65 140.538,102.489 149.95,102.489 150.28,102.159 R20.1@150.28,101.7
  Bottom Layer w0.152: U1.207@95.2,113.7 97.333,111.567 97.333,110.541 98.146,109.728 98.806,109.728 99.39,109.144 99.39,106.553 v1(97.409,104.572)
C11: R21.2 U17.3 U17.8 | length 46.9
  Top Layer w0.152: R21.2@149,107.7 149,108.306 149.406,108.712 150.952,108.712 155.092,112.852 163.551,112.852 163.703,113.005 184.285,113.005 U17.3@185.32,114.04 U17.8@192.94,114.04
C11/IO_VB7N3_202: R21.1 U1.202 | length 62.1
  Top Layer w0.152: v1(97.79,106.705) 97.992,106.908 150.101,106.908 150.28,107.086 R21.1@150.28,107.7
  Bottom Layer w0.152: U1.202@95.2,111.7 94.209,110.709 94.209,106.985 94.488,106.705 v1(97.79,106.705)
C12: R22.2 U22.3 U22.8 | length 85.9
  Top Layer w0.152: U22.3@98.4,98.08 U22.8@106.02,98.08 ; v1(105.639,125.298) 105.994,124.943 141.148,124.943 148.031,118.059 148.031,115.113 149,114.144 R22.2@149,113.7
  Bottom Layer w0.152: v1(105.639,125.298) 104.724,124.384 104.724,99.376 U22.8@106.02,98.08
C12/IO_VB4N0_118: R22.1 U1.117 | length 45.5
  Top Layer w0.152: v1(147.295,112.522) 149.758,112.522 150.28,113.044 R22.1@150.28,113.7
  Bottom Layer w0.152: U1.117@143.2,81.7 143.2,89.86 143.383,90.043 143.383,102.032 143.662,102.311 144.297,102.311 144.602,102.006 144.602,100.33 145.771,99.162 146.431,99.162 147.015,99.746 147.015,105.359 145.821,106.553 145.821,110.16 145.289,110.693 145.289,111.557 146.254,112.522 v1(147.295,112.522)
C13: R23.2 U23.3 U23.8 | length 33.8
  Top Layer w0.152: U23.3@108.5,98.08 U23.8@116.12,98.08 117.121,97.079 140.233,97.079 141,96.312 R23.2@141,95.7
C13/IO_VB4N0_117: R23.1 U1.114 | length 19.2
  Top Layer w0.152: R23.1@142.28,95.7 142.28,96.114 v1(144.196,96.114)
  Bottom Layer w0.152: v1(144.196,96.114) 144.196,80.704 U1.114@145.2,79.7
C14: R24.2 U24.3 U24.8 | length 36.8
  Top Layer w0.152: U24.3@118.62,98.08 U24.8@126.24,98.08 ; v1(139.725,101.092) 140.771,101.092 141,101.321 R24.2@141,101.7
  Bottom Layer w0.152: U24.8@126.24,98.08 126.24,97.309 125.247,96.317 125.247,92.456 125.705,91.999 126.924,91.999 127.381,92.456 127.381,93.701 127.711,94.031 136.5,94.031 139.725,97.257 v1(139.725,101.092)
C14/IO_VB4N0_113: R24.1 U1.112 | length 26
  Top Layer w0.152: R24.1@142.28,101.7 142.28,101.752 v1(144.043,101.752)
  Bottom Layer w0.152: v1(144.043,101.752) 144.043,98.958 148.209,94.793 148.209,80.709 U1.112@147.2,79.7
C15: R26.2 U25.3 U25.8 | length 22.8
  Top Layer w0.152: U25.3@128.7,98.12 U25.8@136.32,98.12 ; v1(139.903,109.525) 141,108.428 R26.2@141,107.7
  Bottom Layer w0.152: U25.8@136.32,98.12 138.938,100.738 138.938,108.56 v1(139.903,109.525)
C15/IO_VB4N2_106: R26.1 U1.103 | length 37
  Top Layer w0.152: R26.1@142.28,107.7 142.28,108.102 v1(146.964,108.102)
  Bottom Layer w0.152: v1(146.964,108.102) 150.21,104.857 150.21,81.057 150.571,80.696 152.204,80.696 U1.103@153.2,79.7
C_a/IO_VB7N2_201: U1.201 U10.10 U11.10 U12.10 U13.10 U14.10 U15.10 U16.10 U17.10 U18.10 U19.10 U20.10 U21.10 U22.10 U23.10 U24.10 U25.10 | length 222.8
  Top Layer w0.152: v1(96.799,119.685) 104.975,119.685 U10.10@106.02,118.64 107.167,119.787 115.013,119.787 U11.10@116.14,118.66 119.308,121.828 123.052,121.828 U12.10@126.22,118.66 127.942,120.382 134.598,120.382 U13.10@136.32,118.66 ; U22.10@106.02,103.16 108.068,105.208 114.072,105.208 U23.10@116.12,103.16 118.294,105.334 122.377,105.334 124.551,103.16 U24.10@126.24,103.16 127.998,104.918 134.602,104.918 U25.10@136.32,103.2 136.887,103.767 151.722,103.767 153.238,105.283 160.497,105.283 U18.10@162.62,103.16 164.921,105.461 170.439,105.461 U19.10@172.74,103.16 173.822,104.242 181.738,104.242 U20.10@182.82,103.16 184.308,104.648 191.412,104.648 U21.10@192.94,103.12 ; U14.10@162.72,119.04 163.771,120.091 171.729,120.091 U15.10@172.72,119.1 173.737,120.117 181.843,120.117 U16.10@182.84,119.12 185.081,121.361 190.699,121.361 U17.10@192.94,119.12
  Bottom Layer w0.152: U1.201@93.2,111.7 94.209,112.709 94.209,116.434 94.475,116.7 96.52,116.7 96.799,116.979 v1(96.799,119.685) ; U22.10@106.02,103.16 107.036,104.176 107.036,117.624 U10.10@106.02,118.64 ; U15.10@172.72,119.1 174.015,117.805 174.015,113.893 172.593,112.471 172.238,112.471 171.73,111.963 171.73,110.49 172.289,109.931 173.304,109.931 173.71,109.525 173.71,104.13 U19.10@172.74,103.16
C_b/IO_VB7N2_200: U1.200 U10.9 U11.9 U12.9 U13.9 U14.9 U15.9 U16.9 U17.9 U18.9 U19.9 U20.9 U21.9 U22.9 U23.9 U24.9 U25.9 | length 212.1
  Top Layer w0.152: U1.200@95.2,109.7 94.209,108.709 94.209,102.972 94.488,102.692 96.19,102.692 97.272,101.61 99.39,101.61 100.38,100.62 U22.9@106.02,100.62 106.767,100.62 107.772,101.625 111.796,101.625 112.801,100.62 U23.9@116.12,100.62 116.865,100.62 117.871,101.625 121.945,101.625 122.951,100.62 U24.9@126.24,100.62 126.884,100.62 128.016,101.752 131.953,101.752 133.045,100.66 U25.9@136.32,100.66 139.03,100.66 139.173,100.517 140.29,100.517 140.54,100.767 150.814,100.767 151.063,101.016 152.883,101.016 153.594,101.727 161.513,101.727 U18.9@162.62,100.62 163.625,101.625 171.735,101.625 U19.9@172.74,100.62 173.745,101.625 181.815,101.625 U20.9@182.82,100.62 183.876,101.676 191.844,101.676 U21.9@192.94,100.58 ; U10.9@106.02,116.1 106.702,116.1 107.823,117.221 111.777,117.221 112.878,116.12 U11.9@116.14,116.12 117.042,116.12 118.042,117.119 121.886,117.119 122.885,116.12 U12.9@126.22,116.12 126.949,116.12 127.949,117.119 132.029,117.119 133.029,116.12 U13.9@136.32,116.12 ; U14.9@162.72,116.5 163.312,116.5 164.465,117.653 171.627,117.653 U15.9@172.72,116.56 173.838,117.678 181.742,117.678 U16.9@182.84,116.58 183.837,117.577 191.943,117.577 U17.9@192.94,116.58
  Bottom Layer w0.152: U25.9@136.32,100.66 137.312,101.652 137.312,115.128 U13.9@136.32,116.12 ; U15.9@172.72,116.56 171.425,115.265 171.425,101.935 U19.9@172.74,100.62
C_c/IO_VB7N2_197: U1.197 U10.7 U11.7 U12.7 U13.7 U14.7 U15.7 U16.7 U17.7 U18.7 U19.7 U20.7 U21.7 U22.7 U23.7 U24.7 U25.7 | length 218.2
  Top Layer w0.152: U1.197@93.2,107.7 91.905,106.405 91.905,97.909 93.269,96.545 105.015,96.545 U22.7@106.02,95.54 107.025,96.545 115.115,96.545 U23.7@116.12,95.54 117.125,96.545 125.235,96.545 U24.7@126.24,95.54 127.372,96.672 135.228,96.672 U25.7@136.32,95.58 140.132,95.58 140.64,95.072 150.749,95.072 152.463,96.785 159.069,96.785 160.314,95.54 U18.7@162.62,95.54 163.625,96.545 171.735,96.545 U19.7@172.74,95.54 173.745,96.545 181.815,96.545 U20.7@182.82,95.54 183.876,96.596 191.844,96.596 U21.7@192.94,95.5 ; U10.7@106.02,111.02 107.141,112.141 115.039,112.141 U11.7@116.14,111.04 117.139,112.039 125.221,112.039 U12.7@126.22,111.04 127.219,112.039 135.321,112.039 U13.7@136.32,111.04 ; U14.7@162.72,111.42 163.873,112.573 171.627,112.573 U15.7@172.72,111.48 173.838,112.598 181.742,112.598 U16.7@182.84,111.5 183.837,112.497 191.943,112.497 U17.7@192.94,111.5
  Bottom Layer w0.152: U25.7@136.32,95.58 135.025,96.875 135.025,109.745 U13.7@136.32,111.04 ; U15.7@172.72,111.48 174.035,110.165 174.035,96.835 U19.7@172.74,95.54
C_d/IO_VB7N2_196: U1.196 U10.5 U11.5 U12.5 U13.5 U14.5 U15.5 U16.5 U17.5 U18.5 U19.5 U20.5 U21.5 U22.5 U23.5 U24.5 U25.5 | length 198.8
  Top Layer w0.152: U22.5@98.4,93 99.401,91.999 107.499,91.999 U23.5@108.5,93 109.501,91.999 117.619,91.999 U24.5@118.62,93 119.723,91.897 127.557,91.897 U25.5@128.7,93.04 129.792,91.948 153.948,91.948 U18.5@155,93 156.001,91.999 164.119,91.999 U19.5@165.12,93 166.121,91.999 174.199,91.999 U20.5@175.2,93 176.303,91.897 184.257,91.897 U21.5@185.32,92.96 ; U10.5@98.4,108.48 99.514,107.366 107.386,107.366 U11.5@108.52,108.5 109.527,107.493 117.593,107.493 U12.5@118.6,108.5 119.607,107.493 127.693,107.493 U13.5@128.7,108.5 ; U14.5@155.1,108.88 156.208,107.772 163.932,107.772 U15.5@165.1,108.94 166.217,107.823 174.083,107.823 U16.5@175.22,108.96 176.23,107.95 184.31,107.95 U17.5@185.32,108.96
  Bottom Layer w0.152: U1.196@95.2,105.7 97.826,105.7 98.4,106.274 U10.5@98.4,108.48 ; U12.5@118.6,108.5 117.627,107.527 117.627,93.993 U24.5@118.62,93 ; U15.5@165.1,108.94 164.13,107.97 164.13,97.465 164.795,96.799 165.608,96.799 166.116,96.291 166.116,93.996 U19.5@165.12,93
C_DP/IO_VB7N2_194: U1.194 U10.6 U11.6 U12.6 U13.6 U14.6 U15.6 U16.6 U17.6 U18.6 U19.6 U20.6 U21.6 U22.6 U23.6 U24.6 U25.6 | length 209.1
  Top Layer w0.152: U1.194@95.2,103.7 96.808,105.308 v1(106.02,105.308) ; U22.6@106.02,93 107.025,94.005 115.115,94.005 U23.6@116.12,93 117.125,94.005 125.235,94.005 U24.6@126.24,93 127.372,94.132 135.228,94.132 U25.6@136.32,93.04 137.387,94.107 161.513,94.107 U18.6@162.62,93 163.625,94.005 171.735,94.005 U19.6@172.74,93 173.745,94.005 181.815,94.005 U20.6@182.82,93 183.876,94.056 191.844,94.056 U21.6@192.94,92.96 ; U10.6@106.02,108.48 107.141,109.601 115.039,109.601 U11.6@116.14,108.5 117.139,109.499 125.221,109.499 U12.6@126.22,108.5 127.219,109.499 135.321,109.499 U13.6@136.32,108.5 ; U14.6@162.72,108.88 163.312,108.88 164.465,110.033 171.627,110.033 U15.6@172.72,108.94 173.838,110.058 181.742,110.058 U16.6@182.84,108.96 183.837,109.957 191.943,109.957 U17.6@192.94,108.96
  Bottom Layer w0.152: v1(106.02,105.308) U10.6@106.02,108.48 ; U12.6@126.22,108.5 127.254,107.466 127.254,94.014 U24.6@126.24,93 ; U15.6@172.72,108.94 171.75,107.97 171.75,102.519 172.659,101.61 173.517,101.61 173.73,101.397 173.73,100.178 173.171,99.619 172.39,99.619 171.729,98.958 171.729,94.011 U19.6@172.74,93
C_e/IO_VB7N0_183: U1.183 U10.4 U11.4 U12.4 U13.4 U14.4 U15.4 U16.4 U17.4 U18.4 U19.4 U20.4 U21.4 U22.4 U23.4 U24.4 U25.4 | length 210.8
  Top Layer w0.152: U22.4@98.4,95.54 99.401,94.539 107.499,94.539 U23.4@108.5,95.54 109.501,94.539 117.619,94.539 U24.4@118.62,95.54 119.723,94.437 127.557,94.437 U25.4@128.7,95.58 129.69,94.59 154.05,94.59 U18.4@155,95.54 156.001,94.539 164.119,94.539 U19.4@165.12,95.54 166.121,94.539 174.199,94.539 U20.4@175.2,95.54 176.303,94.437 184.257,94.437 U21.4@185.32,95.5 ; U10.4@98.4,111.02 99.514,109.906 107.386,109.906 U11.4@108.52,111.04 109.527,110.033 117.593,110.033 U12.4@118.6,111.04 119.607,110.033 127.693,110.033 U13.4@128.7,111.04 ; U14.4@155.1,111.42 156.208,110.312 163.932,110.312 U15.4@165.1,111.48 166.217,110.363 174.083,110.363 U16.4@175.22,111.5 176.23,110.49 184.31,110.49 U17.4@185.32,111.5
  Bottom Layer w0.152: U22.4@98.4,95.54 100.101,93.839 100.101,81.178 100.584,80.696 102.196,80.696 U1.183@103.2,81.7 ; U25.4@128.7,95.58 127.686,96.594 127.686,110.026 U13.4@128.7,111.04 ; U15.4@165.1,111.48 163.825,110.205 163.825,96.835 U19.4@165.12,95.54
C_f/IO_VB7N0_176: U1.176 U10.2 U11.2 U12.2 U13.2 U14.2 U15.2 U16.2 U17.2 U18.2 U19.2 U20.2 U21.2 U22.2 U23.2 U24.2 U25.2 | length 211.5
  Top Layer w0.152: U22.2@98.4,100.62 99.401,99.619 107.499,99.619 U23.2@108.5,100.62 111.785,100.62 112.787,99.619 117.619,99.619 U24.2@118.62,100.62 119.723,99.517 127.557,99.517 U25.2@128.7,100.66 129.792,99.568 145.11,99.568 146.005,100.463 151.367,100.463 151.524,100.62 U18.2@155,100.62 156.001,99.619 164.119,99.619 U19.2@165.12,100.62 168.442,100.62 169.443,99.619 174.199,99.619 U20.2@175.2,100.62 176.303,99.517 184.257,99.517 U21.2@185.32,100.58 ; U10.2@98.4,116.1 99.514,114.986 107.386,114.986 U11.2@108.52,116.12 109.527,115.113 117.593,115.113 U12.2@118.6,116.12 119.607,115.113 127.693,115.113 U13.2@128.7,116.12 ; U14.2@155.1,116.5 156.208,115.392 163.932,115.392 U15.2@165.1,116.56 166.217,115.443 174.083,115.443 U16.2@175.22,116.58 176.23,115.57 184.31,115.57 U17.2@185.32,116.58
  Bottom Layer w0.152: U1.176@107.2,81.7 107.2,99.32 U23.2@108.5,100.62 ; U25.2@128.7,100.66 129.692,101.652 129.692,115.128 U13.2@128.7,116.12 ; U15.2@165.1,116.56 166.395,115.265 166.395,101.895 U19.2@165.12,100.62